# EAGLE board adapter (EAGLE 8.2.2)
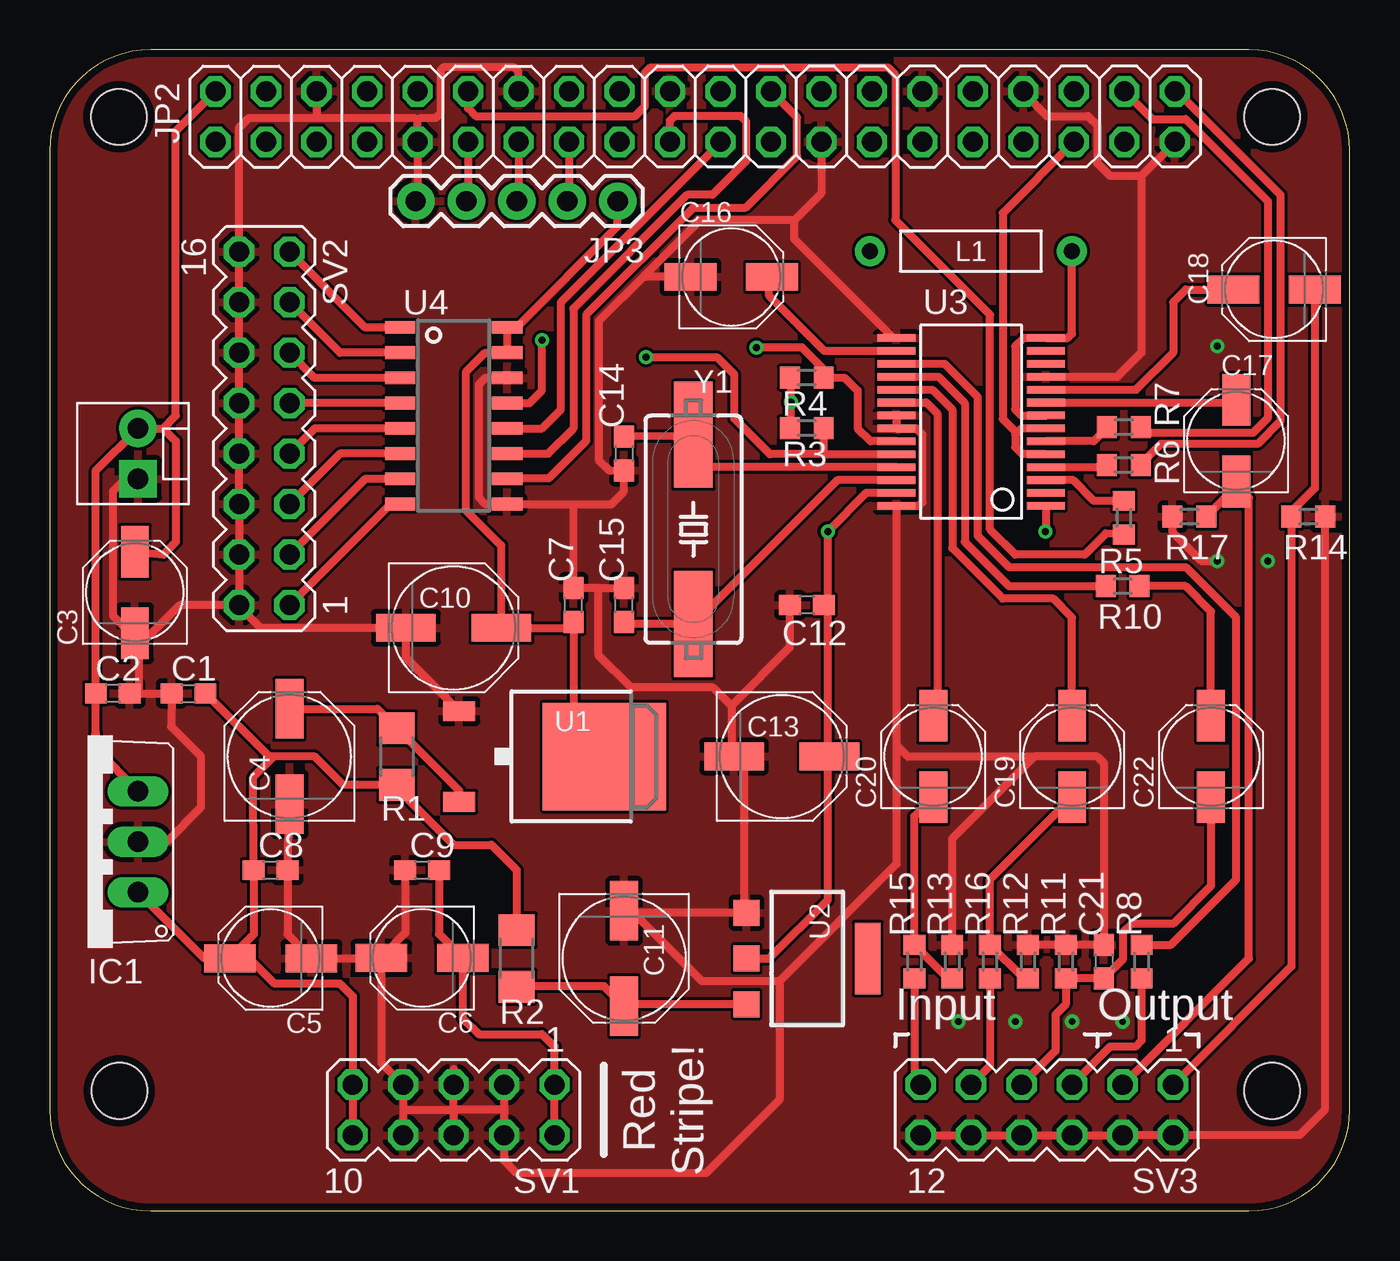
[diagram p0: board, top side]
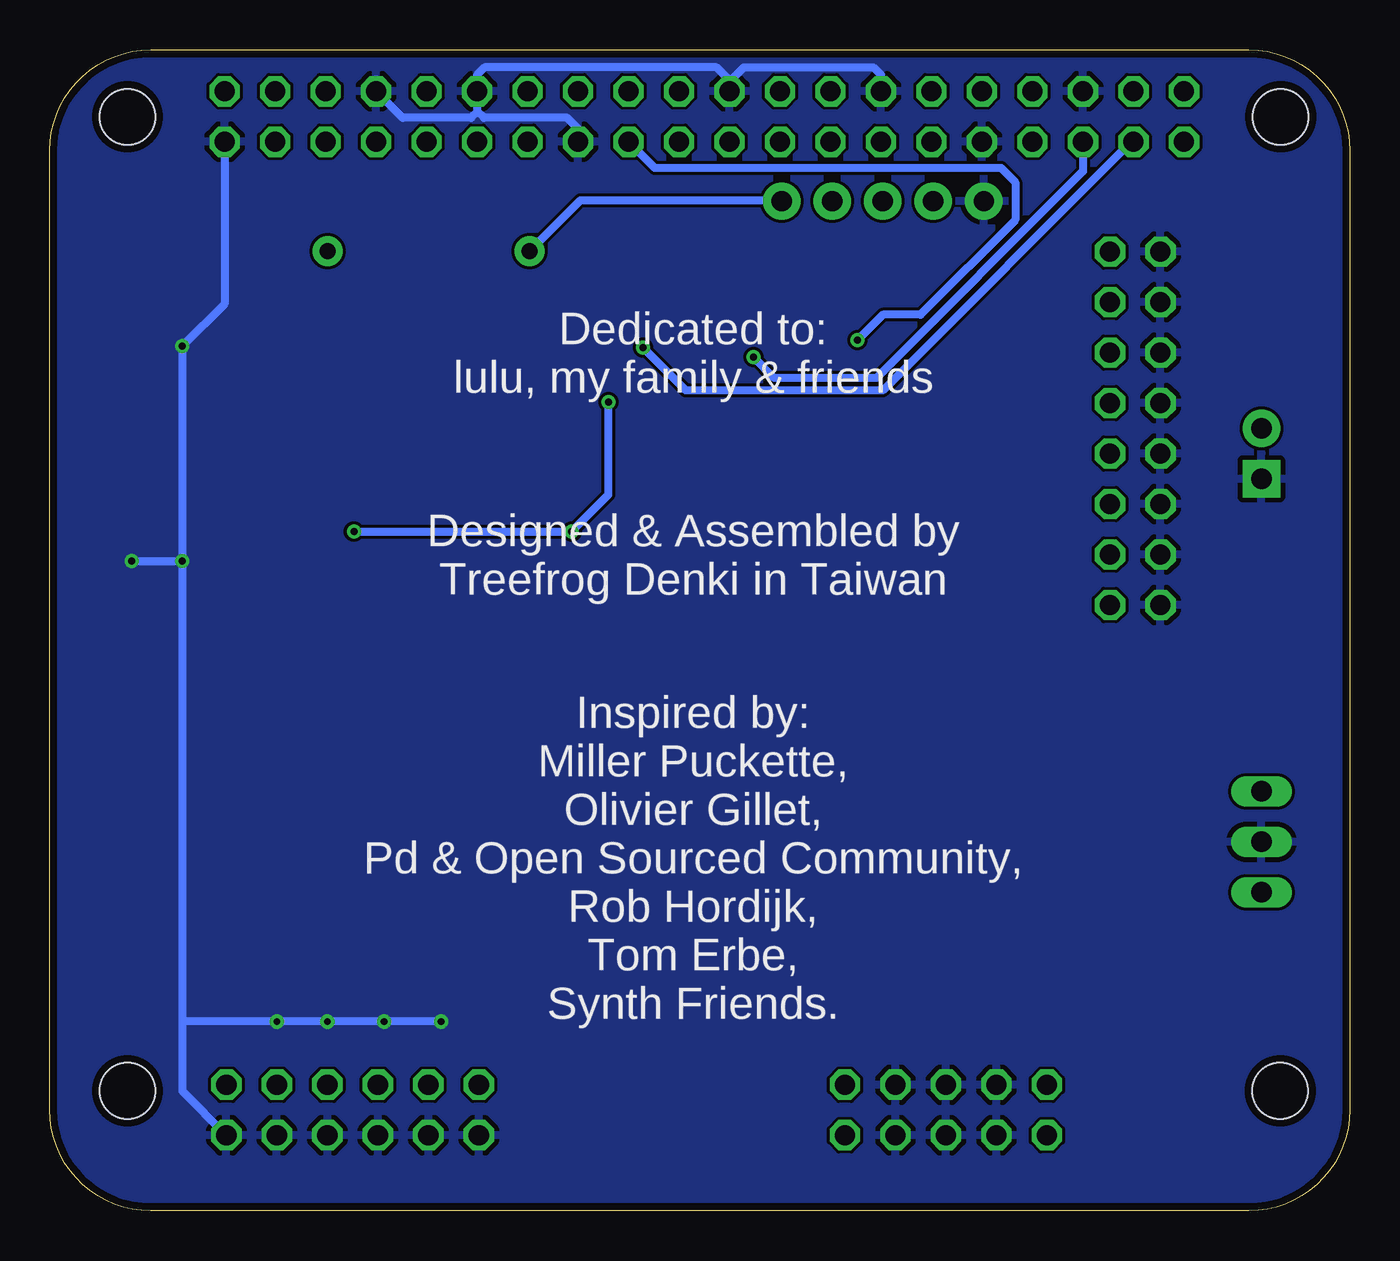
[diagram p1: board, bottom side, seen from below]

Size 65.41 x 58.42 mm. Coordinates in mm from the lower left corner, seen from the top.
Outline: 5.08,0 60.33,0 arc90 65.41,5.08 65.41,53.34 arc90 60.33,58.42 5.08,58.42 arc90 0,53.34 0,5.08 arc90 5.08,0
Copper layers (1*16): Top 0.0356mm / dielectric 1.5011mm / Bottom 0.0356mm
Design rules "oshpark-2layer": minimum track width 6mil, minimum drill 13mil, track to track 6mil, track to pad 6mil, pad to pad 6mil, via to via 6mil, smd to smd 6mil, copper to edge 15mil, drill to drill 6mil, minimum pad ring 7mil, minimum via ring 7mil, stop-mask expansion 2.5mil, vias tented up to drill 0mil, thermal gap 10mil
Net classes: 0 default: width 0.406 mm; 1 power: width 0.406 mm; 2 ground: width 0.406 mm
Holes 2.8 mm at 3.51,6.05 61.49,6.05 61.49,55.04 3.48,55.04

## Footprints (pad centres in the part's own frame; a part is rotated, then mirrored left to right if it is on the bottom)
C0603 = smd 1.1 x 1: 1 -0.85,0; 2 0.85,0
PANASONIC_C = smd 2.6 x 1.4: + 2.05,0; - -2.05,0
PANASONIC_D = smd 3 x 1.4: + 2.4,0; - -2.4,0
TO220V = drill 1.016 long: 1 -2.54,-2.54; 2 0,-2.54; 3 2.54,-2.54
MOLEX-1X2 = drill 1.016 pad 1.88 square: 1 0,0 | drill 1.016 pad 1.88: 2 2.54,0
2X20 = drill 1.016 octagon: 1 -24.13,-1.27; 2 -24.13,1.27; 3 -21.59,-1.27; 4 -21.59,1.27; 5 -19.05,-1.27; 6 -19.05,1.27; 7 -16.51,-1.27; 8 -16.51,1.27; 9 -13.97,-1.27; 10 -13.97,1.27; 11 -11.43,-1.27; 12 -11.43,1.27; 13 -8.89,-1.27; 14 -8.89,1.27; 15 -6.35,-1.27; 16 -6.35,1.27; 17 -3.81,-1.27; 18 -3.81,1.27; 19 -1.27,-1.27; 20 -1.27,1.27; 21 1.27,-1.27; 22 1.27,1.27; 23 3.81,-1.27; 24 3.81,1.27; 25 6.35,-1.27; 26 6.35,1.27; 27 8.89,-1.27; 28 8.89,1.27; 29 11.43,-1.27; 30 11.43,1.27; 31 13.97,-1.27; 32 13.97,1.27; 33 16.51,-1.27; 34 16.51,1.27; 35 19.05,-1.27; 36 19.05,1.27; 37 21.59,-1.27; 38 21.59,1.27; 39 24.13,-1.27; 40 24.13,1.27
1X05 = drill 1.016 pad 1.88: 1 0,0; 2 2.54,0; 3 5.08,0; 4 7.62,0; 5 10.16,0
1/4W_RESISTOR = drill 0.813 pad 1.524: 1 -5.08,0; 2 5.08,0
R1206 = smd 1.6 x 1.803: 1 -1.422,0; 2 1.422,0
R0603 = smd 1 x 1.1: 1 -0.85,0; 2 0.85,0
MA05-2 = drill 1.016 octagon: 1 -5.08,-1.27; 2 -5.08,1.27; 3 -2.54,-1.27; 4 -2.54,1.27; 5 0,-1.27; 6 0,1.27; 7 2.54,-1.27; 8 2.54,1.27; 9 5.08,-1.27; 10 5.08,1.27
MA08-2 = drill 1.016 octagon: 1 -8.89,-1.27; 2 -8.89,1.27; 3 -6.35,-1.27; 4 -6.35,1.27; 5 -3.81,-1.27; 6 -3.81,1.27; 7 -1.27,-1.27; 8 -1.27,1.27; 9 1.27,-1.27; 10 1.27,1.27; 11 3.81,-1.27; 12 3.81,1.27; 13 6.35,-1.27; 14 6.35,1.27; 15 8.89,-1.27; 16 8.89,1.27
MA06-2 = drill 1.016 octagon: 1 -6.35,-1.27; 2 -6.35,1.27; 3 -3.81,-1.27; 4 -3.81,1.27; 5 -1.27,-1.27; 6 -1.27,1.27; 7 1.27,-1.27; 8 1.27,1.27; 9 3.81,-1.27; 10 3.81,1.27; 11 6.35,-1.27; 12 6.35,1.27
TO252 = smd 1 x 1.6: 1 -2.28,-4.8; 2 2.28,-4.8 | smd 5.4 x 6.2: 3 0,2.5
SOT223-R = smd 1.3 x 1.3: 1 -2.3,-3.05; 2 0,-3.05; 3 2.3,-3.05 | smd 3.6 x 1.3: 4 0,3.05
SSOP28 = smd 0.381 x 1.905: 1 -4.55,-3.752; 2 -3.9,-3.752; 3 -3.25,-3.752; 4 -2.6,-3.752; 5 -1.95,-3.752; 6 -1.3,-3.752; 7 -0.65,-3.752; 8 0,-3.752; 9 0.65,-3.752; 10 1.3,-3.752; 11 1.95,-3.752; 12 2.6,-3.752; 13 3.25,-3.752; 14 3.9,-3.752; 15 3.9,3.752; 16 3.25,3.752; 17 2.6,3.752; 18 1.95,3.752; 19 1.3,3.752; 20 0.65,3.752; 21 0,3.752; 22 -0.65,3.752; 23 -1.3,3.752; 24 -1.95,3.752; 25 -2.6,3.752; 26 -3.25,3.752; 27 -3.9,3.752; 28 -4.55,3.752
SOIC16 = smd 0.635 x 1.524: 1 -4.445,-2.695; 2 -3.175,-2.695; 3 -1.905,-2.695; 4 -0.635,-2.695; 5 0.635,-2.695; 6 1.905,-2.695; 7 3.175,-2.695; 8 4.445,-2.695; 9 4.445,2.695; 10 3.175,2.695; 11 1.905,2.695; 12 0.635,2.695; 13 -0.635,2.695; 14 -1.905,2.695; 15 -3.175,2.695; 16 -4.445,2.695
HC49UP = smd 5.334 x 1.93: 1 -4.763,0; 2 4.763,0

## Placement (x,y rotation side)
C1  100nf  [C0603]  6.99,26.04 0 top
C2  100nf  [C0603]  3.17,26.04 180 top
C3  10uf  [PANASONIC_C]  4.29,31.11 90 top
C4  47uf  [PANASONIC_D]  12.06,22.86 90 top
C5  10uf  [PANASONIC_C]  11.11,12.71 180 top
C6  10uf  [PANASONIC_C]  18.73,12.73 180 top
C7  100nf  [C0603]  26.35,30.48 90 top
C8  100nf  [C0603]  11.11,17.14 0 top
C9  100nf  [C0603]  18.73,17.14 0 top
C10  47u  [PANASONIC_D]  20.32,29.34 0 top
C11  47uf  [PANASONIC_D]  28.89,12.7 270 top
C12  100nf  [C0603]  38.1,30.48 180 top
C13  47uf  [PANASONIC_D]  36.83,22.86 0 top
C14  22pf  [C0603]  28.89,38.1 270 top
C15  22pf  [C0603]  28.89,30.48 90 top
C16  10uf  [PANASONIC_C]  34.29,46.99 0 top
C17  10uf  [PANASONIC_C]  59.69,38.75 90 top
C18  10uf  [PANASONIC_C]  61.59,46.35 180 top
C19  10uf  [PANASONIC_C]  51.44,22.86 90 top
C20  10uf  [PANASONIC_C]  44.45,22.86 90 top
C21  220pf  [C0603]  53.02,12.54 270 top
C22  10uf  [PANASONIC_C]  58.42,22.86 90 top
IC1  7805  [TO220V]  1.91,18.57 90 top
JP1  [MOLEX-1X2]  4.45,36.83 90 top
JP2  Raspberry Pi  [2X20]  32.47,55.05 0 top
JP3  encoder  [1X05]  28.57,50.8 180 top
L1  10uh  [1/4W_RESISTOR]  46.34,48.29 180 top
R1  4.7  [R1206]  17.46,22.86 90 top
R2  4.7  [R1206]  23.5,12.7 270 top
R3  1k  [R0603]  38.09,39.38 180 top
R4  1k  [R0603]  38.09,41.92 180 top
R5  27  [R0603]  54.04,34.87 270 top
R6  1k  [R0603]  54.04,37.53 0 top
R7  27  [R0603]  54.04,39.43 0 top
R8  680  [R0603]  54.93,12.54 90 top
R10  10k  [R0603]  53.98,31.43 180 top
R11  47k  [R0603]  51.12,12.54 270 top
R12  4.7k  [R0603]  49.21,12.54 90 top
R13  4.7k  [R0603]  45.4,12.54 90 top
R14  47k  [R0603]  63.32,34.92 0 top
R15  4.7k  [R0603]  43.5,12.54 90 top
R16  4.7k  [R0603]  47.31,12.54 90 top
R17  47k  [R0603]  57.33,34.92 180 top
SV1  [MA05-2]  20.32,5.08 180 top
SV2  [MA08-2]  10.79,39.37 90 top
SV3  [MA06-2]  50.16,5.08 180 top
U1  LM11137  [TO252]  25.4,22.86 270 top
U2  LM11137  [SOT223-R]  38.1,12.7 270 top
U3  WM8731  [SSOP28]  46.35,40.02 90 top
U4  MCP3008  [SOIC16]  20.32,40.01 270 top
Y1  12.288MHZ  [HC49UP]  32.38,34.29 90 top

## Library data of the parts
C1-C22 = rcl
IC1 = linear
JP1 = Icotech_Eagle_Library
JP2 = pinhead
JP3 = ModernDevice
L1 = kweiwen
R1-R8 R10-R17 = resistor
SV1-SV3 = con-lstb; OC_FARNELL: unknown; OC_NEWARK: unknown
U1 U2 = microbuilder
U3 = wm8731
U4 = pimoroni
Y1 = crystal

## Nets
+3.3V [power]: C7.1 C10.+ JP3.1 L1.2 U1.3 U4.15 U4.16
+3.3V_CODEC: C12.1 C13.+ R3.2 R4.2 U2.2 U3.1 U3.27
+5V [power]: C2.2 C3.+ IC1.3 JP1.2 JP2.2
+12V [power]: C1.2 C5.+ C8.1 IC1.1 R1.1 R2.1 SV1.9 SV1.10
-12V [power]: C6.- C9.2 SV1.1 SV1.2
CH1: SV2.15 U4.1
CH2: SV2.13 U4.2
CH3: SV2.11 U4.3
CH4: SV2.9 U4.4
CH5: SV2.7 U4.5
CH6: SV2.5 U4.6
CH7: SV2.3 U4.7
CH8: SV2.1 U4.8
CODEC_LRCK: JP2.35 U3.5 U3.7
CODEC_MISO: JP2.38 R7.2
CODEC_MOSI: JP2.40 R6.2
CODEC_SCK: JP2.12 R5.2
CV_CS0: JP2.24 U4.10
CV_MISO: JP2.21 U4.12
CV_MOSI: JP2.19 U4.11
CV_SCLK: JP2.23 U4.13
GND [ground]: C1.1 C2.1 C3.- C4.- C5.- C6.+ C7.2 C8.2 C9.1 C10.- C11.- C12.2 C13.- C14.2 C15.2 C16.- C21.1 IC1.2 JP1.1 JP2.6 JP2.9 JP2.14 JP2.20 JP2.25 JP2.30 JP2.34 JP2.39 JP3.5 R11.1 R12.2 R13.2 R14.2 R17.2 SV1.3 SV1.4 SV1.5 SV1.6 SV1.7 SV1.8 SV2.2 SV2.4 SV2.6 SV2.8 SV2.10 SV2.12 SV2.14 SV2.16 SV3.2 SV3.4 SV3.6 SV3.8 SV3.10 SV3.12 U1.1 U2.1 U3.11 U3.15 U3.21 U3.22 U3.28 U4.9 U4.14
I2C_SCL: JP2.5 R3.1 U3.24
I2C_SDA: JP2.3 R4.1 U3.23
LIN: R15.1 SV3.11
LOUT: C17.- R17.1 SV3.3
MICBIAS: R8.1 SV3.5
MICIN: C21.2 C22.- R11.2 SV3.7
N$1: R5.1 U3.3
N$2: R6.1 U3.4
N$3: R7.1 U3.6
N$4: C11.+ R2.2 U2.3
N$5: C19.- R12.1 R16.2
N$6: C20.+ U3.20
N$7: C19.+ U3.19
N$8: C20.- R13.1 R15.2
N$9: R8.2 U3.17
N$10: R10.2 U3.18
N$11: C22.+ R10.1
N$15: L1.1 U3.8 U3.14
N$16: C17.+ U3.9
N$17: C16.+ U3.16
N$18: C14.1 U3.25 Y1.2
N$20: C15.1 U3.26 Y1.1
N$22: C18.+ U3.10
N$28: C4.+ R1.2 U1.2
PHASE_A: JP2.11 JP3.4
PHASE_B: JP2.13 JP3.3
RIN: R16.1 SV3.9
ROUT: C18.- R14.1 SV3.1
SWITCH: JP2.15 JP3.2

## Tracks (layer width: path | path; a pad name or v marks a point on that pad's centre or on a via)
+3.3V
  Top 0.406: JP3.1 28.57,49.53 23.5,44.45 U4.16 U4.15 21.91,43.18 20.95,42.23 20.95,35.24 22.72,33.48 C10.+ 26.08,29.34 C7.1 26.35,24.41 U1.3 26,24.77 25.72,24.77
  Bottom 0.406: JP3.1 28.6,50.83 38.72,50.83 L1.2
+3.3V_CODEC  (via drill 0.35)
  Top 0.406: U2.2 36.2,12.7 39.14,15.65 39.14,22.77 | v50.1,34.17 v50.11,34.17 U3.1 | 39.69,22.86 C13.+ | U3.27 41.07,36.12 v39.14,34.19 39.14,30.65 C12.1 39.14,30.31 39.14,22.77 | 38.98,22.86 C13.+ | 39.14,22.77 C13.+ | R4.2 37.3,41.86 v37.3,40.68 37.3,39.45 R3.2
  Bottom 0.406: v50.1,34.17 39.16,34.17 v39.14,34.19 37.3,36.03 v37.3,40.68
+5V
  Top 0.406: JP2.2 6.35,54.33 6.35,40.01 5.71,39.37 | 2.3,23.89 2.3,24.13 | 2.3,24.13 C2.2 2.33,37.25 JP1.2 5.71,39.37 | C3.+ 5.71,33.02 6.35,33.66 6.35,38.73 5.71,39.37 | 2.3,24.13 2.3,23.26 IC1.3
+12V
  Top 0.406: 9.21,12.92 C5.+ | 10.24,17.39 C8.1 | R1.1 17.46,21.47 17.45,21.46 | R1.1 17.46,21.27 20.32,18.41 22.23,18.41 23.5,17.14 R2.1 | C5.+ 9.84,12.91 | 9.84,12.91 9.95,12.91 | C8.1 10.24,21.83 11.27,22.86 | 11.27,22.86 13.34,22.86 14.76,21.44 R1.1 | 9.84,12.91 11.32,11.43 14.61,11.43 15.24,10.79 SV1.9 SV1.10 | C5.+ 8.2,12.91 | 11.27,22.86 11.04,22.86 C1.2 | C8.1 10.26,13.91 C5.+ | C5.+ 7.77,12.71 IC1.1
-12V
  Top 0.406: SV1.2 SV1.1 25.4,8.26 24.77,8.89 21.59,8.89 20.78,9.7 C6.- 19.58,13.93 C9.2
CH1
  Top 0.406: U4.1 15.88,44.45 SV2.15
CH2
  Top 0.406: U4.2 14.61,43.18 SV2.13
CH3
  Top 0.406: U4.3 13.34,41.91 SV2.11
CH4
  Top 0.406: U4.4 SV2.9
CH5
  Top 0.406: U4.5 13.34,39.37 SV2.7
CH6
  Top 0.406: U4.6 14.61,38.1 SV2.5
CH7
  Top 0.406: U4.7 15.88,36.83 SV2.3
CH8
  Top 0.406: U4.8 17.14,35.56 SV2.1
CODEC_LRCK
  Top 0.406: U3.5 48.93,38.07 48.58,38.42 48.58,39.05 | U3.7 48.89,39.37 48.58,39.05 | 48.58,39.05 48.58,39.21 47.94,39.85 47.94,50.2 JP2.35 51.44,53.66
CODEC_MISO
  Top 0.406: JP2.38 55.46,54.93 57.15,54.93 61.28,50.8 61.28,39.88 60.54,39.14 55.12,39.14 R7.2 55.18,39.14
CODEC_MOSI
  Top 0.406: JP2.40 56.71,56.33 61.91,51.12 61.91,39.73 60.77,38.58 55.89,38.58 54.89,37.59 R6.2
CODEC_SCK
  Top 0.406: JP2.12 21.04,55.47 21.43,55.09 29.46,55.09 29.95,55.58 29.95,57.25 30.23,57.53 42.16,57.53 42.55,57.15 42.55,49.85 47.31,45.09 47.31,34.29 48.58,33.02 52.07,33.02 53.13,34.08 R5.2
CV_CS0
  Top 0.406: U4.10 23.08,36.85 25.1,36.85 26.99,38.73 26.99,45.09 32.38,50.48 35.02,50.48 37.6,53.06 37.6,55.01 JP2.24
CV_MISO
  Top 0.406: U4.12 24.77,39.37 25.72,40.32 25.72,45.72 33.81,53.82 JP2.21
CV_MOSI
  Top 0.406: U4.11 25.08,38.1 26.35,39.37 26.35,45.4 32.07,51.12 33.34,51.12 35.05,52.83 35.05,54.8 34.77,55.09 31.43,55.09 31.2,54.86 JP2.19
CV_SCLK  (via drill 0.35)
  Top 0.406: U4.13 24.13,40.64 24.77,41.27 v24.77,43.81
  Bottom 0.406: JP2.23 34.98,52.48 17.55,52.48 16.83,51.75 16.83,49.85 21.59,45.09 23.5,45.09 v24.77,43.81
GND  (via drill 0.35)
  Top 0.406: U4.9 21.91,35.56 21.59,35.88 21.59,41.59 21.91,41.91 U4.14 | U4.9 23,35.56 | 18.5,54.84 JP2.9 18.5,50.89 JP3.5 | 54.93,52.07 54.93,43.18 53.72,41.97 U3.11 | 54.93,52.07 56.52,53.66 JP2.39 | JP2.34 49.05,56.2 50.16,55.09 52.23,55.09 52.7,54.61 52.7,52.7 53.34,52.07 54.93,52.07 | 23.58,57.24 JP2.14 23.58,57.31 23.37,57.53 19.81,57.53 19.68,57.4 19.68,55.24 19.43,54.99 18.67,54.99 18.52,54.84 18.5,54.84 | 29.21,15.42 C11.- 28.99,15 29.37,15 | 13.34,54.99 10.03,54.99 9.53,54.48 SV2.16 SV2.14 SV2.12 SV2.10 SV2.8 SV2.6 SV2.4 SV2.2 9.46,30.48 | 13.34,54.99 18.35,54.99 18.5,54.84 | JP2.6 13.42,55.08 13.34,54.99 | U2.1 29.37,15 | JP2.25 38.82,51.21 37.47,49.85 | 37.47,49.85 32.7,49.85 29.92,47.06 | C6.+ 16.82,12.91 17.88,13.97 C9.1 | 29.21,37.47 C14.2 | 29.16,37.47 C14.2 | 29.92,47.06 27.62,44.77 27.62,37.78 28.18,37.23 C14.2 | U4.9 26.35,35.56 | 26.35,35.56 C7.2 27.68,31.33 | 26.35,35.56 28.26,35.56 28.89,36.2 C14.2 | 35.06,15.02 U2.1 | 34.29,25.4 33.34,26.35 29.21,26.35 27.62,27.94 27.62,31.27 27.68,31.33 | 34.29,25.4 34.29,23 C13.- 34.92,22.86 34.92,15.24 U2.1 | C21.1 52.94,13.34 | U3.15 42.44,43.92 37.47,48.9 37.47,49.85 | 34.29,25.4 37.23,28.34 37.23,30.48 C12.2 | R14.2 64.11,34.77 64.14,34.77 64.14,5.08 62.87,3.81 SV3.2 SV3.4 SV3.6 SV3.8 SV3.10 SV3.12 | 56.52,34.9 R17.2 56.48,34.16 57.94,32.7 v58.74,32.7 | U1.1 17.92,27.82 C10.- | 36.7,11.56 32.81,11.56 29.37,15 | C4.- 11.99,20.38 C8.2 11.96,13.91 C5.- 16.37,12.71 16.68,12.4 | 16.67,12.86 C6.+ | C2.1 4.6,26.04 | 4.6,26.04 C1.1 6.11,24.37 7.62,22.86 7.62,20.32 5.87,18.57 IC1.2 | 4.38,28.75 C3.- | 4.49,28.42 4.38,28.75 | 4.49,28.42 4.49,26.15 4.6,26.04
  Top 0.406: JP1.1 3.81,36.83 3.17,36.2 3.17,29.96 4.38,28.75 | 17.79,29.21 C10.- | 17.78,5.08 SV1.7 16.68,7.45 16.68,12.4 | 17.78,5.08 SV1.8 | SV1.3 22.86,5.08 | 22.86,5.08 SV1.4 22.86,2.54 23.5,1.91 33.02,1.91 36.7,5.59 36.7,11.56 | 20.32,5.05 SV1.6 | 20.32,5.05 SV1.5 20.32,7.14 | 17.78,5.08 20.29,5.08 20.32,5.05 | 22.86,5.08 20.35,5.08 20.32,5.05 | C16.- 29.99,46.99 29.92,47.06 | R13.2 45.4,18.73 49.53,22.86 | 49.53,22.86 52.7,22.86 53.02,22.54 C21.1 | 42.6,23.44 43.18,22.86 49.53,22.86 | 42.6,23.44 42.6,17.46 36.7,11.56 | 16.68,12.4 C6.+ | 27.68,31.33 C15.2 | U3.21 U3.22 43.6,39.37 43.91,39.05 43.91,35.66 43.72,35.47 U3.28 42.6,23.44 | R12.2 R11.1 C21.1 | 9.46,30.48 6.55,30.48 4.49,28.42 | C10.- 10.61,29.34 9.46,30.48
  Bottom 0.406: JP2.30 43.9,55.33 | JP2.25 38.82,54.45 39.37,54.99 43.56,54.99 43.9,55.33 | JP2.30 43.9,57.15 43.52,57.53 31.85,57.53 31.2,56.88 JP2.20 31.2,56.81 30.48,57.53 23.96,57.53 23.58,57.15 JP2.14 | 48.98,56.92 JP2.34 47.65,54.99 44.2,54.99 43.9,55.28 43.9,55.33 | JP2.30 43.9,55.47 | 58.74,32.6 v58.74,32.7 v58.74,43.5 56.6,45.63 JP2.39 | 58.74,32.6 58.74,9.53 | 58.74,9.53 58.74,6.03 SV3.2 | v53.98,9.53 v51.44,9.53 v48.58,9.53 v45.72,9.53 58.74,9.53 | v61.28,32.7 58.84,32.7 58.74,32.6
  pour Bottom: 0,0 66.04,0 66.04,58.42 0,58.42
  pour Top: 0,0 66.04,0 66.04,58.42 0,58.42
I2C_SCL  (via drill 0.35)
  Top 0.406: 38.97,38.07 U3.24 | 38.97,38.07 36.23,38.07 34.44,39.85 34.44,42.08 33.57,42.95 v30,42.95 | R3.1 38.94,38.1 38.97,38.07
  Bottom 0.406: JP2.5 13.42,52.3 23.81,41.91 28.96,41.91 v30,42.95
I2C_SDA  (via drill 0.35)
  Top 0.406: U3.23 41.29,38.72 40.64,39.37 40.64,41.27 39.99,41.92 R4.1 | 38.89,41.91 R4.1 | v35.56,43.43 37.85,43.43 38.94,42.34 R4.1
  Bottom 0.406: JP2.3 10.99,53.78 23.5,41.27 33.4,41.27 v35.56,43.43
LIN
  Top 0.406: SV3.11 43.5,6.67 R15.1
LOUT
  Top 0.406: 60.01,36.2 59.89,36.2 59.81,36.39 | 59.81,36.39 C17.- 59.69,36.43 R17.1 58.13,35.08 | SV3.3 60.33,12.7 60.33,35.88 59.81,36.39
MICBIAS
  Top 0.406: 54.77,11.59 54.93,11.59 R8.1 54.93,8.57 54.61,8.26 53.34,8.26 SV3.5
MICIN
  Top 0.406: SV3.7 50.6,8.05 50.6,9.87 51.12,10.39 R11.2 C21.2 53.98,12.64 53.98,13.97 54.02,14.02 54.02,14.04 54.43,14.45 56.52,14.45 58.42,16.35 C22.-
N$1
  Top 0.406: U3.3 51.5,36.77 52.54,35.72 R5.1
N$2
  Top 0.406: R6.1 53.13,37.42 U3.4
N$3
  Top 0.406: U3.6 52.53,38.72 53.19,39.38 R7.1
N$4
  Top 0.406: U2.3 28.99,10.4 C11.+ 27.89,11.3 23.52,11.3 R2.2 24.05,11.3
N$5
  Top 0.406: 48.9,11.75 R12.1 49.01,11.69 R16.2 | R16.2 | R16.2 47.31,16.68 C19.-
N$6
  Top 0.406: U3.20 44.1,40.67 44.65,40.12 44.65,25.11 C20.+
N$7
  Top 0.406: U3.19 44.41,41.32 45.4,40.32 45.4,33.34 47.94,30.8 50.48,30.8 51.44,29.84 C19.+ 51.75,24.77
N$8
  Top 0.406: C20.- 43.5,19.86 R15.2 45.2,11.69 R13.1
N$9
  Top 0.406: U3.17 45.01,42.62 46.67,40.96 46.67,33.97 48.26,32.38 57.15,32.38 59.69,29.84 59.69,16.67 56.41,13.39 R8.2
N$10
  Top 0.406: U3.18 44.71,41.97 46.04,40.64 46.04,33.66 48.26,31.43 R10.2
N$11
  Top 0.406: R10.1 57.15,31.43 58.42,30.16 C22.+ 58.62,25.11
N$15
  Top 0.406: U3.8 50.09,40.01 48.9,40.01 48.58,40.32 48.58,43.5 49,43.92 U3.14 51.22,43.92 51.44,44.13 51.44,48.27 L1.1
N$16
  Top 0.406: U3.9 59.87,40.67 C17.+
N$17
  Top 0.406: U3.16 38.97,43.27 36.2,46.04 36.2,46.78 C16.+
N$18
  Top 0.406: U3.25 32.38,37.42 Y1.2 32.31,38.98 C14.1
N$20
  Top 0.406: 32.97,29.48 Y1.1 | Y1.1 29.29,29.53 C15.1 | U3.26 39.62,36.77 Y1.1
N$22
  Top 0.406: U3.10 54.65,41.32 56.52,43.18 56.52,45.72 57.15,46.35 C18.+
N$28
  Top 0.406: 20.64,20.62 U1.2 20.6,21.14 17.54,24.2 R1.2 16.48,25.26 C4.+
PHASE_A
  Top 0.406: JP2.11 21.04,50.89 JP3.4
PHASE_B
  Top 0.406: JP2.13 23.58,50.89 JP3.3
RIN
  Top 0.406: SV3.9 47.31,7.3 R16.1
ROUT
  Top 0.406: C18.- 63.65,36.37 62.36,35.08 R14.1 62.47,12.3 SV3.1
SWITCH
  Top 0.406: JP2.15 26.12,50.89 JP3.2

## Text on the board
tNames: Input | Output | Red / Stripe!
bNames: Dedicated to: / lulu, my family & friends | Designed & Assembled by / Treefrog Denki in Taiwan | Inspired by: / Miller Puckette, / Olivier Gillet, / Pd & Open Sourced Community, / Rob Hordijk, / Tom Erbe, / Synth Friends.